# EAGLE board panel_back (EAGLE 9.5.1)
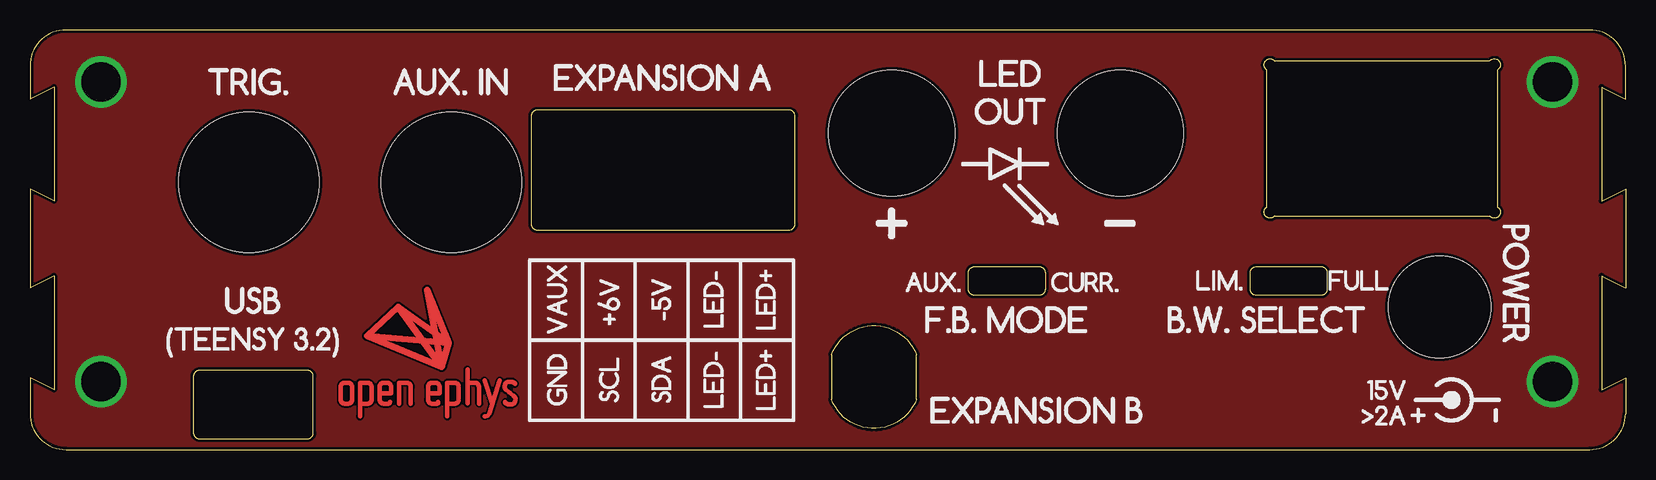
[diagram p0: board, top side]
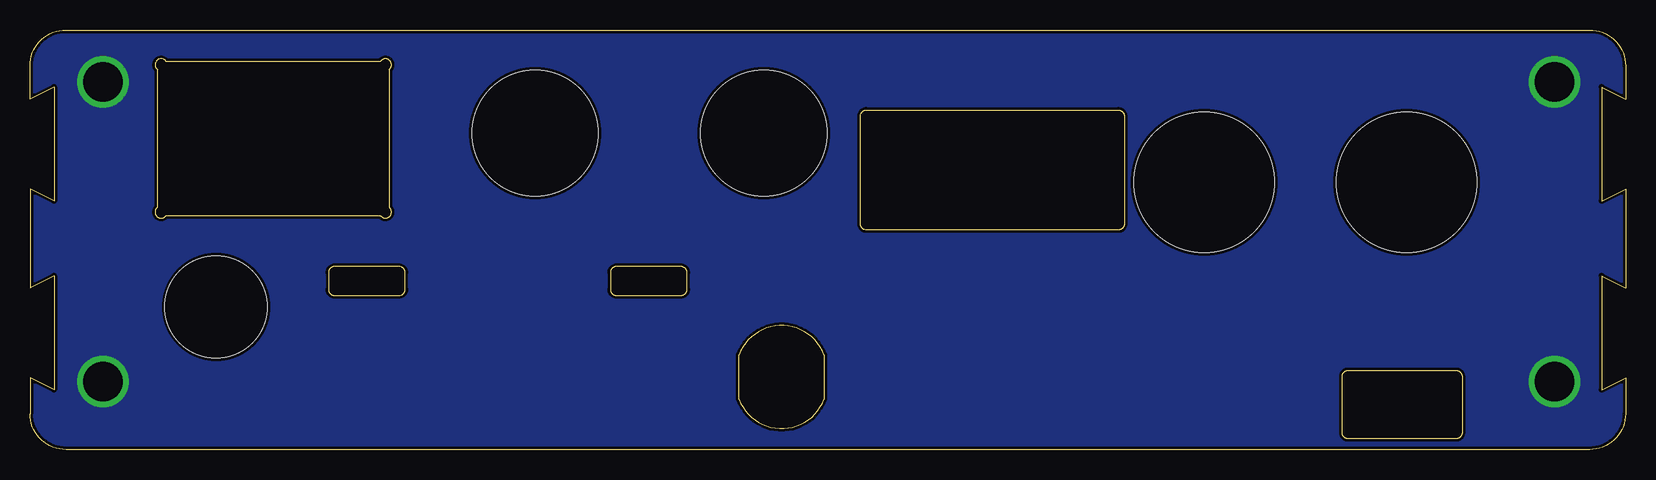
[diagram p1: board, bottom side, seen from below]

Size 133 x 35 mm. Coordinates in mm from the lower left corner, seen from the top.
Outline: 0,32 0,29.25 2,30.25 2,20.75 0,21.75 0,13.5 2,14.5 2,5 0,6 0,3 arc90 3,0 130,0 arc90 133,3 133,6 131,5 131,14.5 133,13.5 133,21.75 131,20.75 131,30.25 133,29.25 133,32 arc90 130,35 3,35 arc90 0,32
Outline: 63.78,18.82 63.78,27.82 arc90 63.28,28.32 42.28,28.32 arc90 41.78,27.82 41.78,18.82 arc90 42.28,18.32 63.28,18.32 arc90 63.78,18.82
Outline: 103.77,19.5 121.67,19.5 arc196 122.37,20.2 122.37,31.7 arc196 121.67,32.4 103.77,32.4 arc196 103.07,31.7 103.07,20.2 arc196 103.77,19.5
Outline: 23.62,1.4 23.62,6.1 arc90 23.12,6.6 14.12,6.6 arc90 13.62,6.1 13.62,1.4 arc90 14.12,0.9 23.12,0.9 arc90 23.62,1.4
Outline: 102.22,15.26 107.62,15.26 arc-90 108.12,14.76 108.12,13.36 arc-90 107.62,12.86 102.22,12.86 arc-90 101.72,13.36 101.72,14.76 arc-90 102.22,15.26
Outline: 78.72,15.26 84.12,15.26 arc-90 84.62,14.76 84.62,13.36 arc-90 84.12,12.86 78.72,12.86 arc-90 78.22,13.36 78.22,14.76 arc-90 78.72,15.26
Outline: 66.8,7.9 arc-138 73.9,7.9 73.9,4.2 arc-138 66.8,4.2 66.8,7.9
Copper layers (1*16): Top 0.035mm / dielectric 1.5mm / Bottom 0.035mm
Design rules "seeed-studio-2-layer": minimum track width 6mil, minimum drill 12mil, track to track 6mil, track to pad 6mil, pad to pad 6mil, via to via 6mil, smd to smd 0mil, copper to edge 10mil, drill to drill 10mil, minimum pad ring 10mil, minimum via ring 6mil, stop-mask expansion 2mil, vias tented up to drill 100mil, thermal gap 10mil
Holes 11.7 mm at 18.24,22.28 35.13,22.28
Holes 10.5 mm at 71.83,26.4 90.88,26.4
Holes 8.5 mm at 117.49,11.9

## Placement (x,y rotation side)
E$1  [OE-LOGO-14X10]  32.5,6.5 0 top

## Library data of the parts
E$1 = jonnew

## Tracks (layer width: path | path; a pad name or v marks a point on that pad's centre or on a via)
GND  (via drill 3.3 pad 4.32)
  other vias: 5.92,30.66 5.92,5.67 126.92,5.67 126.92,30.66
  pour Bottom: -2.2,-3 -2.2,37.8 135.8,37.8 135.8,-3
  pour Top: -2.2,-2.5 -2.2,38.3 135.8,38.3 135.8,-2.5